# Altium PCB PCB2.PcbDoc
Units mil, origin at the board's own origin, x right, y up, seen from the top; angles counter-clockwise.
Board outline 2165.35 x 1338.58 mil, 2 copper layers (Top Layer, Bottom Layer); 36 components, 47 nets, 197 pads, 0 vias.
Unrouted connection lines stored in the file: 103.
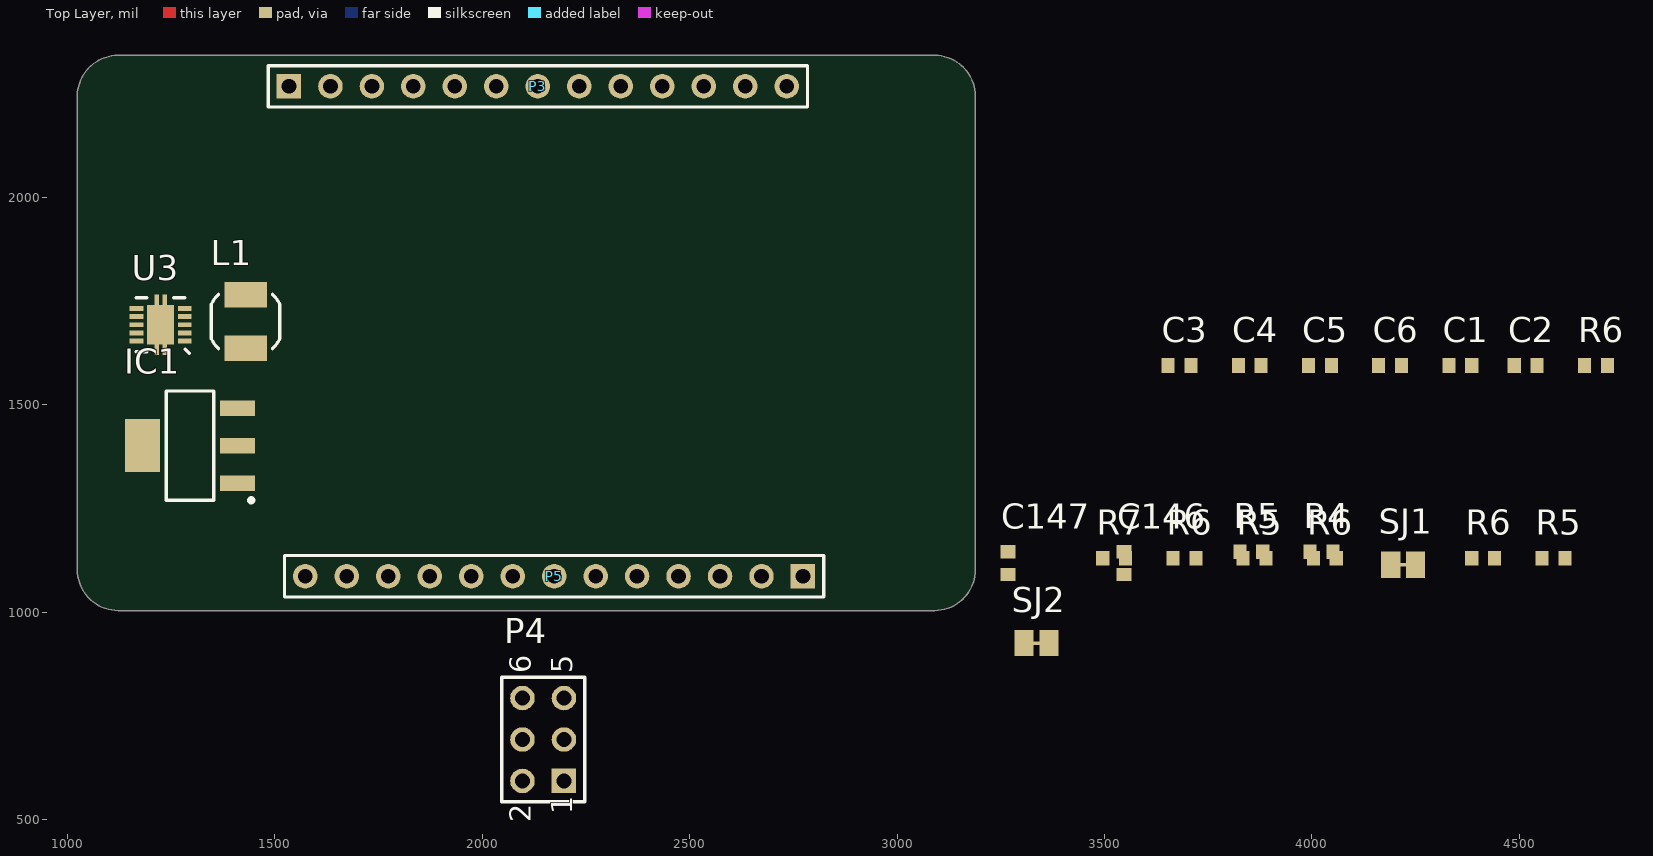
[diagram p0: Top Layer view]
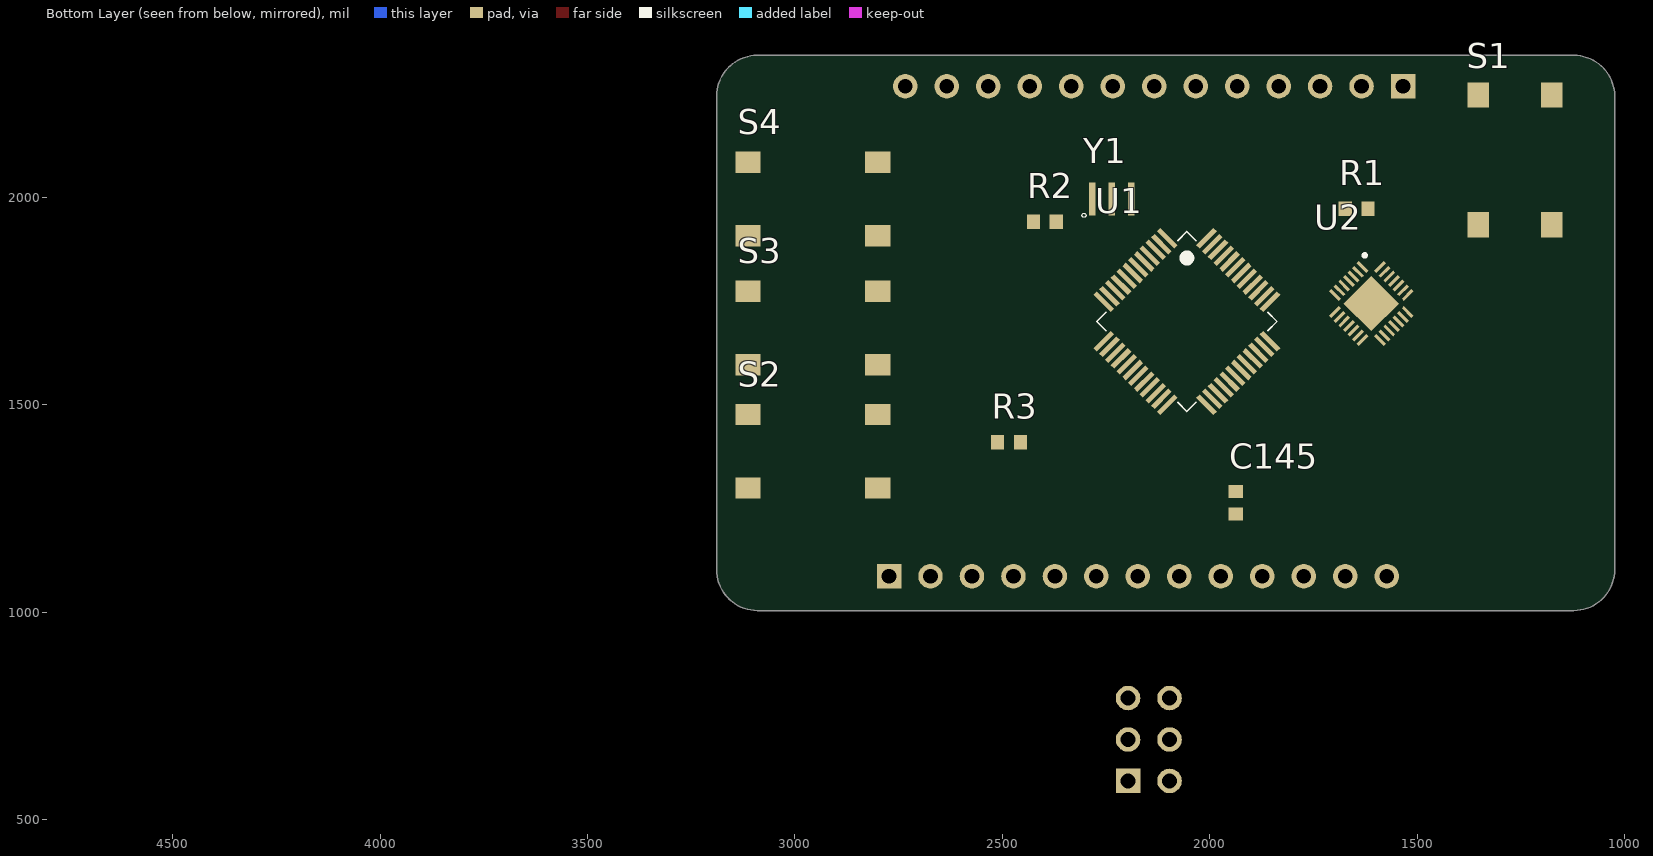
[diagram p1: Bottom Layer view, seen from below]

## Layer stack, top to bottom
Top Solder: solder mask 0.4, Solder Resist, Dk 3.5
Top Layer: signal copper 1.4
Dielectric 1: dielectric 12.6, FR-4, Dk 4.8
Bottom Layer: signal copper 1.4
Bottom Solder: solder mask 0.4, Solder Resist, Dk 3.5

## Board outline
1023.62,1102.36 1023.62,2244.09 cw(c1122.05,2244.09) 1122.05,2342.52 3090.55,2342.52 cw(c3090.55,2244.09) 3188.98,2244.09 3188.98,1102.36 cw(c3090.55,1102.36) 3090.55,1003.94 1122.05,1003.94 cw(c1122.05,1102.36)

## Design rules (kind name [scope] priority, off if disabled: settings)
Clearance [All] p1: gap=0.12 ignorepadtopadclearanceinfootprint=FALSE except(0: Arc-Hole Track-Hole SMDPad-Hole THPad-Hole Via-Hole Fill-Hole Poly-Hole Region-Hole Text-Hole)
ComponentClearance [All] p1: gap=0.01 collisioncheckmode=3 verticalgap=10 showdistances=FALSE
PolygonConnect [All] p1: connectstyle=Relief reliefconductorwidth=10 reliefentries=4 polygonreliefangle="90 Angle" airgapwidth=10
RoutingVias [All] p1: holewidth=28 width=50 viastyle="Through Hole" minholewidth=28 minwidth=50 maxholewidth=28 maxwidth=50
SolderMaskExpansion [All] p1: expansion=4
Width [All] p1: maxlimit=10 minlimit=10 preferedwidth=10
29 further rules are at their usual default settings.

## Classes and differential pairs
component class U_Sheet2: C145 C146 C147 P3 P4 P5 R1 R2 R3 R4 R5 R6 R7 S1 S2 S3 S4 SJ1 SJ2 U1 U2 Y1
component class U_Sheet3: C1 C2 C3 C4 C5 C6 IC1 L1 R6 U3

## Components (designator, comment, footprint, x,y, rotation, side; value= is the part's Value field where it differs from the comment)
C1 "10uF" "C 0603 / 1608" 4358.26,1594.48 r0 top
C2 "0.1uF" "C 0603 / 1608" 4515.74,1594.48 r0 top
C3 "0.1uF" "C 0603 / 1608" 3681.09,1594.48 r0 top
C4 "10uF" "C 0603 / 1608" 3850.39,1594.48 r0 top
C5 "1uF" "C 0603 / 1608" 4019.68,1594.48 r0 top
C6 "0.1uF" "C 0603 / 1608" 4188.97,1594.48 r0 top
C145 "Capacitor" "C 0603 / 1608" 1937.01,1263.78 r90 bottom
C146 "0.1uF" "C 0603 / 1608" 3547.24,1118.11 r90 top
C147 "0.22uF" "C 0603 / 1608" 3267.71,1118.11 r90 top
IC1 "LM1117MP-1.8/NOPB" SOT230P700X180-4N 1295.28,1401.57 r180 top
L1 "10uH" IND_COILCRAFT_SD43 1429.13,1700.79 r270 top
P3 "Header 13" HDR1X13 1533.86,2267.72 r0 top
P4 "Header 3X2" HDR2X3 2196.85,592.91 r90 top
P5 "Header 13" HDR1X13 2773.23,1086.61 r180 top
R1 "Res1" "C 0603 / 1608" 1645.67,1972.44 r180 bottom value=100k
R2 "Res1" "C 0603 / 1608" 2397.64,1940.94 r180 bottom value=100k
R3 "Res1" "C 0603 / 1608" 2484.25,1409.45 r180 bottom value=10k
R4 "Res1" "C 0603 / 1608" 4023.61,1145.67 r0 top value=20k
R5 "Res1" "C 0603 / 1608" 4582.67,1129.92 r0 top value=20kNC
R5 "Res1" "C 0603 / 1608" 3862.2,1129.92 r0 top value=20k
R5 "Res1" "C 0603 / 1608" 3854.32,1145.67 r0 top value=20k
R6 "Res1" "C 0603 / 1608" 3692.91,1129.92 r0 top value=20kNC
R6 "Res1" "C 0603 / 1608" 4413.38,1129.92 r0 top value=4.7k
R6 "Res1" "C 0603 / 1608" 4031.49,1129.92 r0 top value=20k
R6 "Res1" "C 0603 / 1608" 4685.03,1594.48 r0 top value=100k
R7 "Res1" "C 0603 / 1608" 3523.61,1129.92 r0 top value=4.7k
S1 "DTSM-6" DTSM-6 1263.78,2090.55 r90 bottom
S2 "DTSM-6" DTSM-6 2956.69,1387.79 r0 bottom
S3 "DTSM-6" DTSM-6 2956.69,1685.04 r0 bottom
S4 "DTSM-6" DTSM-6 2956.69,1996.06 r0 bottom
SJ1 "" SOLDERJUMPER_CLOSEDWIRE 4220.46,1114.17 r0 top
SJ2 "" SOLDERJUMPER_CLOSEDWIRE 3336.14,925.2 r0 top
U1 "STM32F103C8T6" LQFP48_7X7MM_0.5MMPP 2055.12,1700.79 r225 bottom
U2 "LED Lighting Drivers LED Driver   Source:  Datasheet" QFN40P400X400X80-29N 1610.24,1744.09 r225 bottom
U3 "TPS61202" QFN-10_PAD 1224.41,1692.91 r90 top
Y1 "" OSC_CSTCE8M00G55-R0 2236.22,1996.06 r180 bottom

## Footprints (in the part's own frame and the unit in brackets; to place one, negate y for a bottom-side part, rotate by r counter-clockwise, add the part's x,y. Pads: shape width x height; smd on the part's side, far side on the other; paste and mask are expansions set on the pad)
"C 0603 / 1608" [mm] "Capacitor 0603 / 1608 (1.6 x 0.8 mm)"
  rect 0.8x0.9 smd: 1(-0.7,0) 2(0.7,0)
  body extent -0.8,-0.4 0.8,0.4, height 0.3
DTSM-6 [mil]
  rect 61.02x51.18 smd: 1(-156.5,88.58) 2(156.5,88.58) 3(-156.5,-88.58) 4(156.5,-88.58)
HDR1X13 [mm] "Connector; Header; 13 Position"
  rect 1.5x1.5 hole 0.9: 1(0,0)
  round 1.5 hole 0.9: 2(2.54,0) 3(5.08,0) 4(7.62,0) 5(10.16,0) 6(12.7,0) 7(15.24,0) 8(17.78,0) 9(20.32,0) 10(22.86,0) 11(25.4,0) 12(27.94,0) 13(30.48,0)
  silkscreen extent -1.27,-1.27 31.75,1.27
HDR2X3 [mm] "Connector; Header; 3x2 Position"
  rect 1.5x1.5 hole 0.9: 1(0,0)
  round 1.5 hole 0.9: 2(0,2.54) 3(2.54,0) 4(2.54,2.54) 5(5.08,0) 6(5.08,2.54)
  silkscreen extent -1.27,-1.27 6.35,3.81
IND_COILCRAFT_SD43 [mm] "SMD Inductor  Body Width 4.2mm Body Lenght 4.7mm Height 3.45mm"
  rect 1.55x2.6 smd: 1(-1.64,0) 2(1.64,0)
  silkscreen extent -1.67,-2.1 1.67,2.1, body extent -2.35,-2.1 2.35,2.1, height 3.45
LQFP48_7X7MM_0.5MMPP [mm]
  rect 1.5x0.3 smd: 1(-4.45,2.75) 2(-4.45,2.25) 3(-4.45,1.75) 4(-4.45,1.25) 5(-4.45,0.75) 6(-4.45,0.25) 7(-4.45,-0.25) 8(-4.45,-0.75) 9(-4.45,-1.25) 10(-4.45,-1.75) 11(-4.45,-2.25) 12(-4.45,-2.75) 25(4.45,-2.75) 26(4.45,-2.25) 27(4.45,-1.75) 28(4.45,-1.25) 29(4.45,-0.75) 30(4.45,-0.25) 31(4.45,0.25) 32(4.45,0.75) 33(4.45,1.25) 34(4.45,1.75) 35(4.45,2.25) 36(4.45,2.75)
  rect 0.3x1.5 smd: 13(-2.75,-4.45) 14(-2.25,-4.45) 15(-1.75,-4.45) 16(-1.25,-4.45) 17(-0.75,-4.45) 18(-0.25,-4.45) 19(0.25,-4.45) 20(0.75,-4.45) 21(1.25,-4.45) 22(1.75,-4.45) 23(2.25,-4.45) 24(2.75,-4.45) 37(2.75,4.45) 38(2.25,4.45) 39(1.75,4.45) 40(1.25,4.45) 41(0.75,4.45) 42(0.25,4.45) 43(-0.25,4.45) 44(-0.75,4.45) 45(-1.25,4.45) 46(-1.75,4.45) 47(-2.25,4.45) 48(-2.75,4.45)
  silkscreen extent -3.9,-3.9 3.9,3.9
OSC_CSTCE8M00G55-R0 [mm]
  rect 0.4x2 smd: 1(-1.2,0) 2(0,0) 3(1.2,0)
  silkscreen extent -1.83,-1.13 -1.57,-0.87
QFN40P400X400X80-29N [mil]
  rect 33.46x7.87 smd: 1(-76.77,47.24) 2(-76.77,31.5) 3(-76.77,15.75) 4(-76.77,0) 5(-76.77,-15.75) 6(-76.77,-31.5) 7(-76.77,-47.24) 15(76.77,-47.24) 16(76.77,-31.5) 17(76.77,-15.75) 18(76.77,0) 19(76.77,15.75) 20(76.77,31.5) 21(76.77,47.24)
  rect 7.87x33.46 smd: 8(-47.24,-76.77) 9(-31.5,-76.77) 10(-15.75,-76.77) 11(0,-76.77) 12(15.75,-76.77) 13(31.5,-76.77) 14(47.24,-76.77) 22(47.24,76.77) 23(31.5,76.77) 24(15.75,76.77) 25(0,76.77) 26(-15.75,76.77) 27(-31.5,76.77) 28(-47.24,76.77)
  rect 94.49x94.49 smd: 29(0,0)
  silkscreen extent -97,67 -90,75
QFN-10_PAD [mm]
  rect 0.297x0.85 smd: 1(-1,-1.475) 2(-0.5,-1.475) 3(0,-1.475) 4(0.5,-1.475) 5(1,-1.475) 6(1,1.475) 7(0.5,1.475) 8(0,1.475) 9(-0.5,1.475) 10(-1,1.475)
  rect 0.7x0.28 smd: 11(-1.5,0.25) 12(-1.5,-0.25) 13(1.5,0.25) 14(1.5,-0.25)
  rect 2.4x1.65 smd: 15(0,0)
  silkscreen extent -1.75,-1.75 1.65,1.5
SOLDERJUMPER_CLOSEDWIRE [mil]
  rect 46x63 smd paste-31.5: 1(-30,0) 2(30,0)
  rect 25x8 smd paste-12.5: WIRE(0,0)
SOT230P700X180-4N [mm] "SOT223, 2.30mm pitch; 3 pin, 3.70mm W X 6.70mm L, IPC Medium Density"
  rect 2.15x0.95 smd: 1(-2.9,2.3) 2(-2.9,0) 3(-2.9,-2.3)
  rect 2.15x3.25 smd: 4(2.9,0)
  silkscreen extent -3.88,-3.35 1.45,3.47, body extent -3.65,-3.35 3.65,3.35, height 1.81

## Part data
C1 C2 C3 C4 C5 C6 C146 C147: library part Capacitor
IC1: "3-Terminal Regulator 1=GND 2=OUT 3=IN 4=OUT", Case=SOT223, Manufacturer="TEXAS INSTRUMENTS", Author="CERN DEM JLC", Bonding=No, ComponentHeight=1.8mm, Component Type=Standard, CreateDate=18/01/2011, Device=LM1117MP-1.8/NOPB, HelpURL=\\cern.ch\dfs\Applications\Altium\Datasheets\LM1117MP-1.8-NOPB.pdf, LatestRevisionDate=16/09/2014, Manufacturer Part Number=LM1117MP-1.8/NOPB, Mounted=Yes, PackageDescription="SOT223, 2.30mm pitch; 3 pin, 3.70mm W X 6.70mm L, IPC Medium Density", Part Description="1.8V 800mA Low-Dropout Linear Regulator", Part Number=LM1117MP-1.8/NOPB, Pin Count=4, PressFit=No, Sense=No, SMD=Yes, Socket=No
L1: library part IND_10UH_20%_COILCRAFT_SD43-103MLB, "Inductor With Core", Manufacturer=COILCRAFT, Manufacturer Part Number=SD43-103MLB, Power=1.3A, Resistance=0.182R, Tolerance=±20%, Author="CERN DEM JLC", ComponentHeight=3.45mm, Component Type=Standard, CreateDate=05/12/2016, HelpURL=\\cern.ch\dfs\Applications\Altium\Datasheets\IND_COILCRAFT_SD43.pdf, LatestRevisionDate=05/12/2016, Mounted=Yes, Part Description="SMT Power Inductor (SD43 Series)", Part Number=IND_10UH_20%_COILCRAFT_SD43-103MLB, Pin Count=2, Sense=No, SMD=Yes, Socket=No, Status=None
P3 P5: "Header, 13-Pin", LatestRevisionDate=17-Jul-2002, LatestRevisionNote="Re-released for DXP Platform.", Publisher="Altium Limited"
P4: "Header, 3-Pin, Dual row", LatestRevisionDate=17-Jul-2002, LatestRevisionNote="Re-released for DXP Platform.", Publisher="Altium Limited"
R1 R2 R3 R4 R5 R5 R5 R6 R6 R6 R6 R7: "Resistor", LatestRevisionDate=17-Jul-2002, LatestRevisionNote="Re-released for DXP Platform.", PackageDescription="Axial Device, Thru-Hole; 2 Leads; 0.3 in Pin Spacing", PackageReference=AXIAL-0.3, Published=8-Jun-2000, Publisher="Altium Limited"
SJ1 SJ2: library part SOLDERJUMPERCLOSED
U1: "Mainstream Performance line, ARM Cortex-M3 MCU with 64 Kbytes Flash, 72 MHz CPU, motor control, USB and CAN", Package="LQFP-48 STMicroelectronics", Availability=Good, MF=STMicroelectronics, MP=STM32F103C8T6, Price="4.41 USD"
U2: library part IS31FL3731-QFLS2-TR, Manufacturer_Name="Integrated Silicon Solution Inc.", Arrow_Part_Number=IS31FL3731-QFLS2-TR, Arrow_Price-Stock=https://www.arrow.com/en/products/is31fl3731-qfls2-tr/integrated-silicon-solution-inc, Height=0.8mm, Manufacturer_Part_Number=IS31FL3731-QFLS2-TR
U3: library part TPS61200, "0.3V Input Voltage Boost Converter with 1.3A Switches and Down Mode in 3x3 QFN", Package="QFN-10 Texas Instruments", Availability=Unavailable, MF="Texas Instruments", MP=TPS61200, Price=None, SnapEDA_Link=https://www.snapeda.com/parts/TPS61200/Texas%2520Instruments/view-part/?ref=snap
Y1: library part CSTCE8M00G55-R0, "Ceramic Resonator 8MHz ??0.5% _Tol_ ??0.2% _Stability_ 33pF 40Ohm 3-Pin CSMD T/R", Package="SMD-3 Murata", Availability=Good, MF=Murata, MP=CSTCE8M00G55-R0, Price="0.27 USD", SnapEDA_Link=https://www.snapeda.com/parts/CSTCE8M00G55-R0/Murata%20Electronics%20North%20America/view-part/?ref=snap

## Nets (pads, with @x,y where several pads share a name; then routed paths per layer and width w, separated by ;. In a path a pad name is that pad's centre, name@x,y a point inside that pad or via, vN(x,y) a via of type N, cw(c..) or ccw(c..) an arc to the next point about the centre after c; other vN are vias at no path point)
ADDR: R5.2@3881.88,1145.67 U2.18
AU_IN: C147.2 U2.17
BOOT0: R1.1 U1.44
BOOT1: R2.2 U1.20
CA1: P3.1 U2.21
CA2: P3.2 U2.22
CA3: P3.3 U2.23
CA4: P3.4 U2.24
CA5: P3.5 U2.25
CA6: P3.6 U2.26
CA7: P3.7 U2.27
CA8: P3.8 U2.28
CA9: P3.9 U2.1
CB1: P5.1 U2.7
CB2: P5.2 U2.8
CB3: P5.3 U2.9
CB4: P5.4 U2.10
CB5: P5.5 U2.11
CB6: P5.6 U2.12
CB7: P5.7 U2.13
CB8: P5.8 U2.14
CB9: P5.9
FILT: C146.2 U2.16
GND: C1.1 C2.1 C3.1 C4.1 C5.1 C6.1 C145.2 C146.1 C147.1 IC1.1 P4.5 P4.6 R4.2 R5.1@3826.76,1145.67 S1.1 S1.2 S2.1 S2.2 S3.1 S3.2 S4.1 S4.2 U1.8 U1.23 U1.35 U1.47 U2.5 U3.4 U3.8 U3.9 U3.11 U3.12 U3.13 U3.14 U3.15 Y1.2
NetC3_2: C3.2 U3.1
NetL1_2: L1.2 U3.3
NetP4_3: P4.3 R1.2
NetP4_4: P4.4 R2.1
NetR4_1: R4.1 U2.6
NetR5_2: R5.2@3889.76,1129.92 U2.4
NetR6_2: R6.2@4712.59,1594.49 U3.6
OSC_IN: U1.5 Y1.1
OSC_OUT: U1.6 Y1.3
RESET: C145.1 R3.2 S1.3 S1.4 U1.7
SCL_LED: R5.2@4610.23,1129.92 R6.2@4440.94,1129.92 SJ1.1 U2.20
SCL_uC: SJ1.2
SDA_LED: R6.2@3720.47,1129.92 R7.2 SJ2.1 U2.19
SDA_uC: SJ2.2
SW1: S2.3 S2.4 U1.12
SW2: S3.3 S3.4 U1.11
SW3: S4.3 S4.4 U1.10
SWCLK: U1.37
SWIO: U1.34
VBAT: U1.1
VCC3V3: IC1.2 IC1.4 P4.1 P4.2 R3.1 R6.1@4385.82,1129.92 R7.1 U1.9 U1.24 U1.36 U1.48
VCC5V: C4.2 C5.2 C6.2 IC1.3 R5.1@3834.64,1129.92 R5.1@4555.11,1129.92 R6.1@3665.35,1129.92 R6.1@4003.93,1129.92 U2.2 U3.2 U3.10
Vin: C1.2 C2.2 L1.1 R6.1@4657.47,1594.49 U3.5 U3.7
pads on no net: P3.10 P3.11 P3.12 P3.13 P5.10 P5.11 P5.12 P5.13 R6.2@4059.05,1129.92 SJ1.WIRE SJ2.WIRE U1.2 U1.3 U1.4 U1.13 U1.14 U1.15 U1.16 U1.17 U1.18 U1.19 U1.21 U1.22 U1.25 U1.26 U1.27 U1.28 U1.29 U1.30 U1.31 U1.32 U1.33 U1.38 U1.39 U1.40 U1.41 U1.42 U1.43 U1.45 U1.46 U2.3 U2.15 U2.29

## Silkscreen, mask and mechanical layers (free items; w line width, h text height)
Mechanical 1:
  lines w10: 1023.62,1102.36 ccw(c1122.05,1102.36) 1122.05,1003.94 3090.55,1003.94 ccw(c3090.55,1102.36) 3188.98,1102.36 3188.98,2244.09 ccw(c3090.55,2244.09) 3090.55,2342.52 1122.05,2342.52 ccw(c1122.05,2244.09) 1023.62,2244.09 1023.62,1102.36 ; 1031.5,1106.3 ccw(c1129.92,1106.3) 1129.92,1007.87 3098.43,1007.87 ccw(c3098.43,1106.3) 3196.85,1106.3 3196.85,2248.03 ccw(c3098.43,2248.03) 3098.43,2346.46 1129.92,2346.46 ccw(c1129.92,2248.03) 1031.5,2248.03 1031.5,1106.3

## Text inside footprints (layer, text, board x,y; h text height)
P4: Top Overlay "6" at 2116.85,852.91 h50 r90; Top Overlay "5" at 2216.85,852.91 h50 r90; Top Overlay "2" at 2116.85,492.91 h50 r90; Top Overlay "1" at 2216.85,512.91 h50 r90